# Altium PCB PM_Adapter_Pi_Pico_v3.PcbDoc
Units mil, origin at the board's own origin, x right, y up, seen from the top; angles counter-clockwise.
Board outline 1570 x 2130 mil, 2 copper layers (Top Layer, Bottom Layer); 20 components, 18 nets, 114 pads, 0 vias.
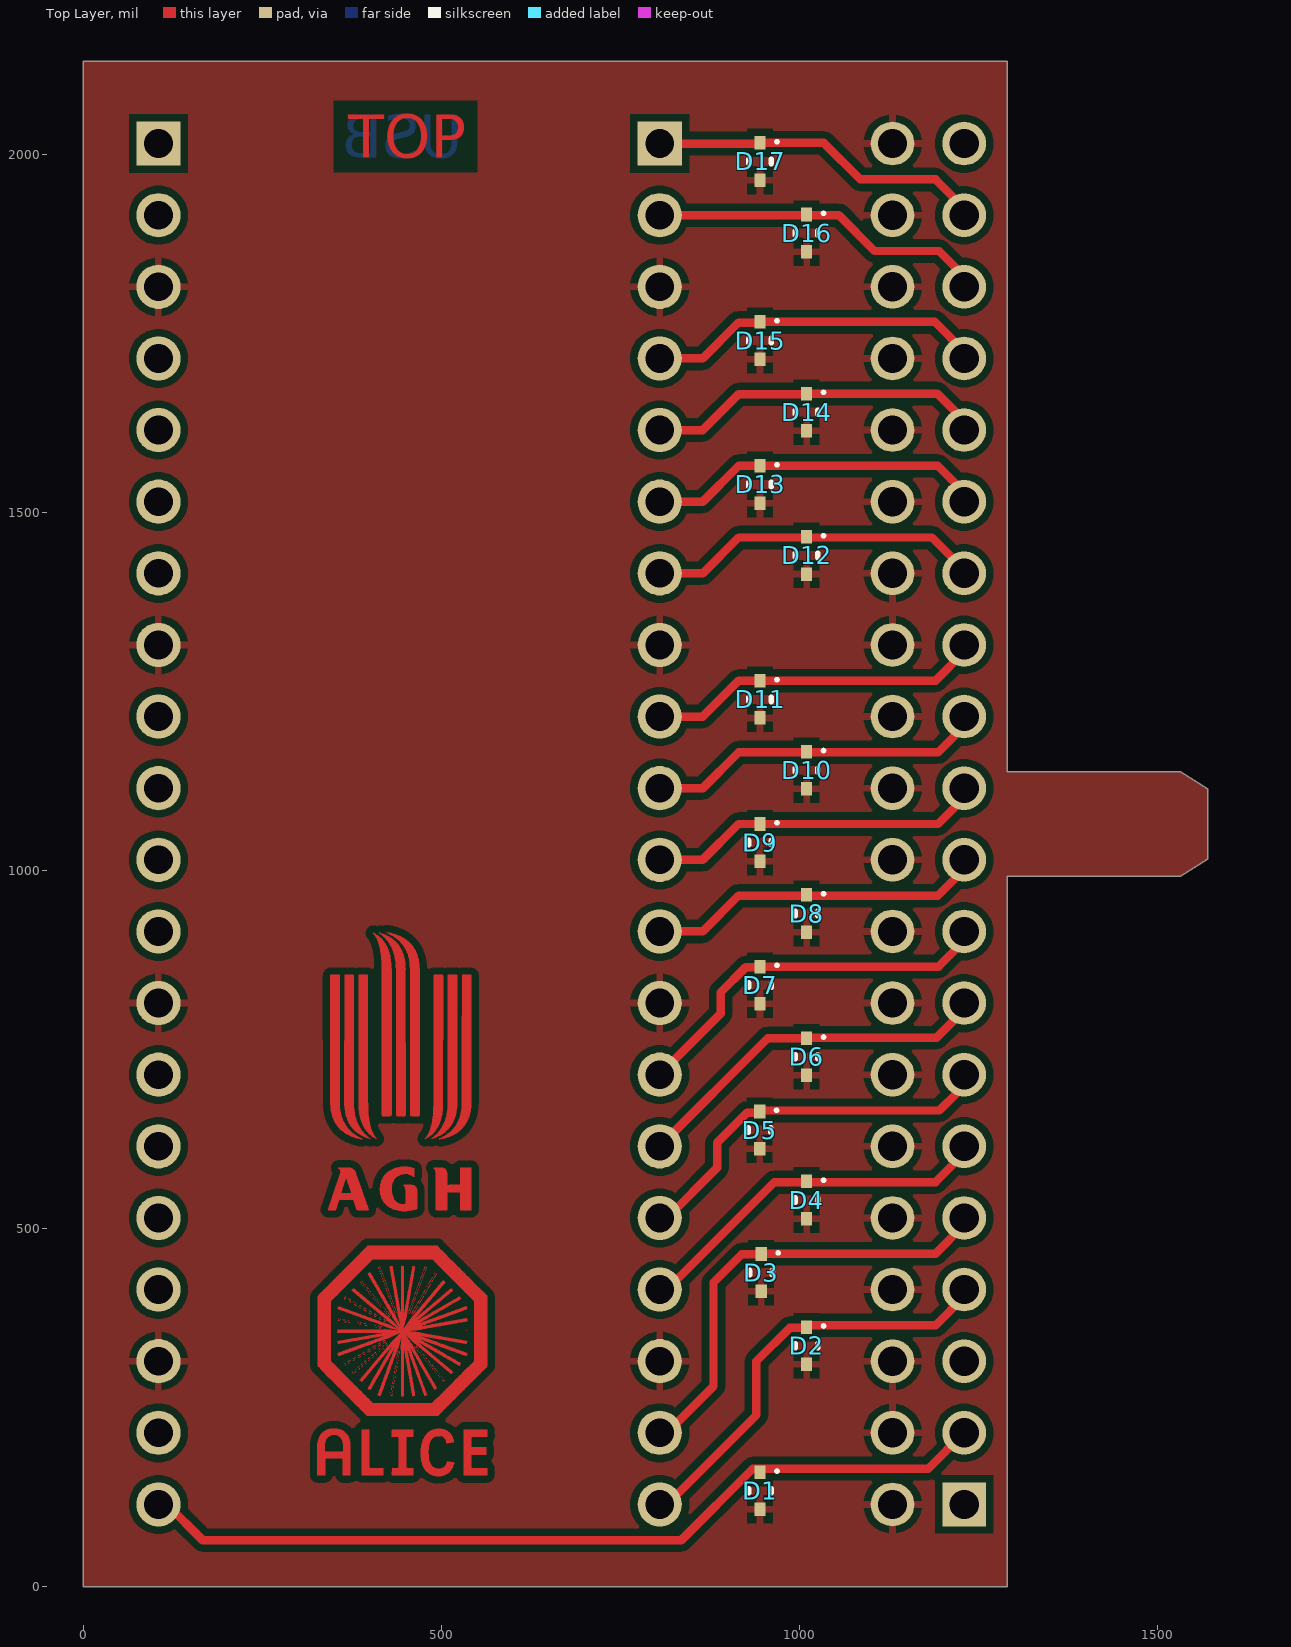
[diagram p0: Top Layer view]
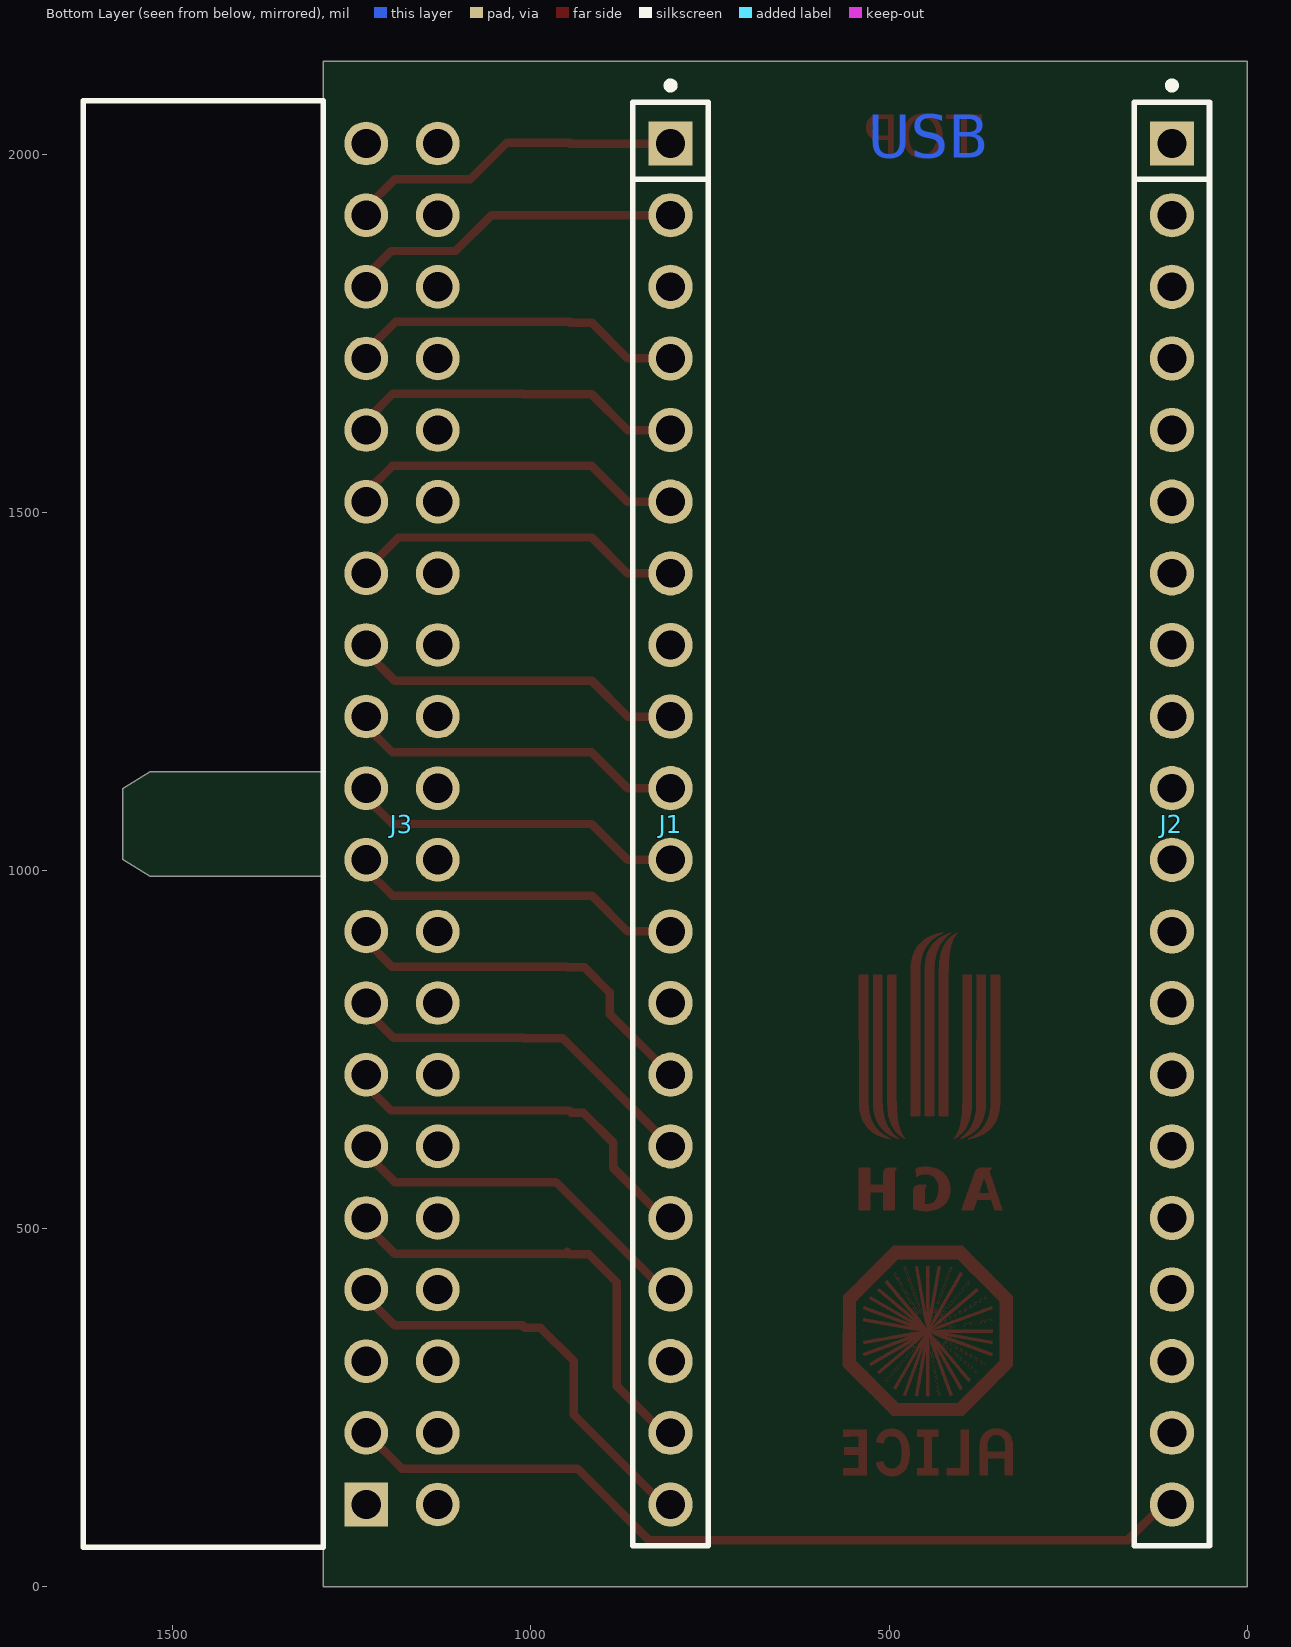
[diagram p1: Bottom Layer view, seen from below]
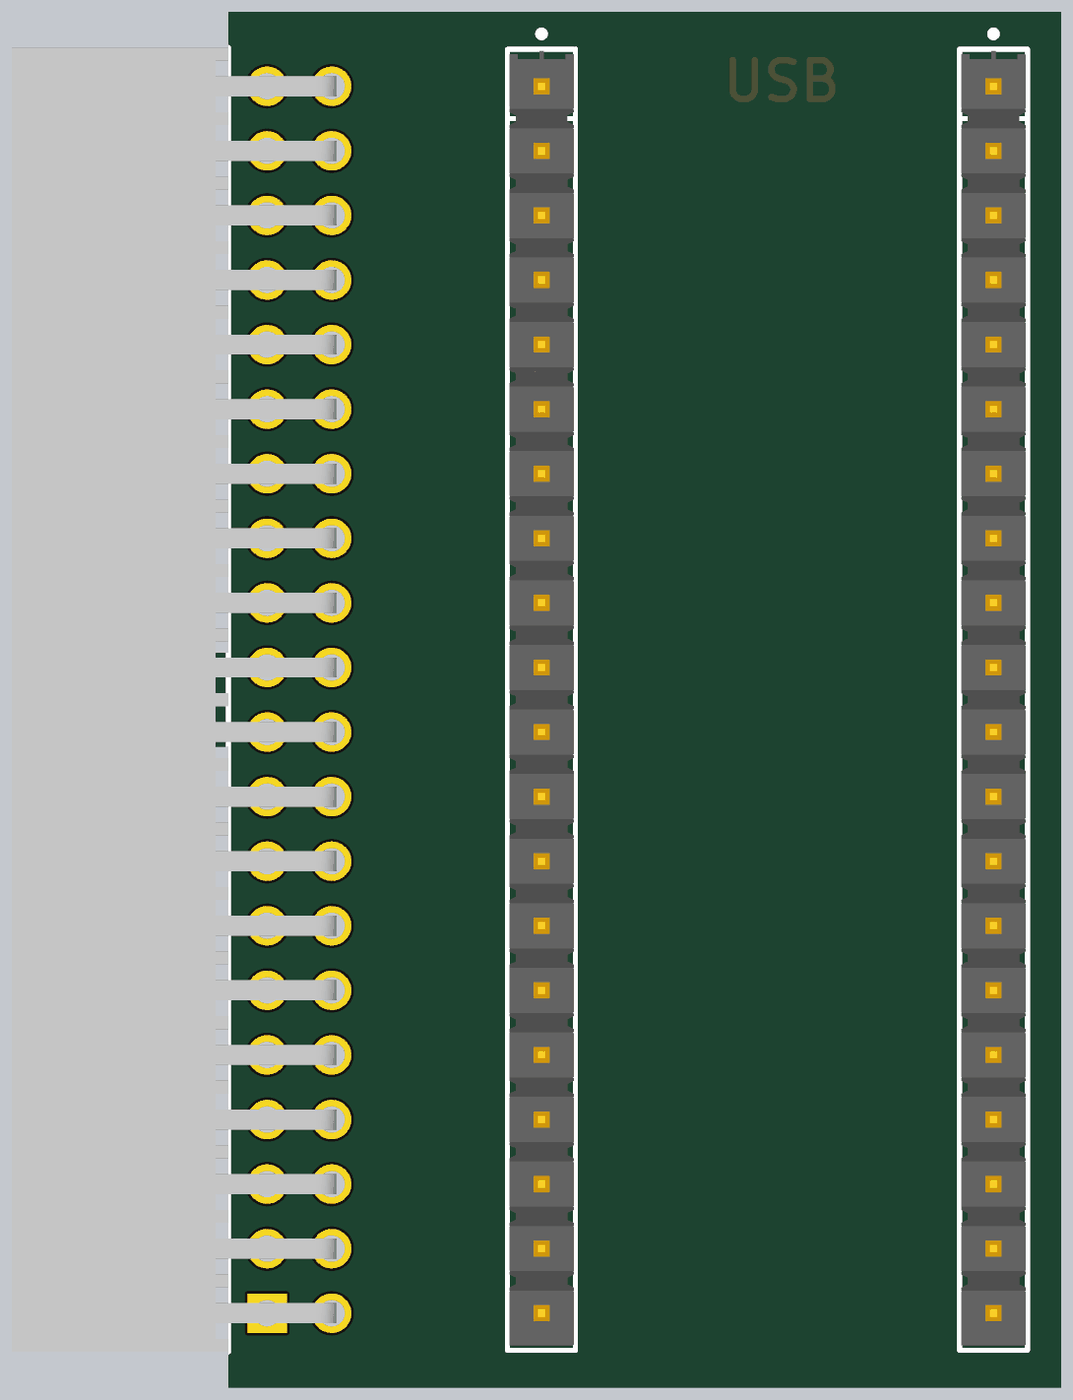
[diagram p2: 3D render of the assembled board from below, using the file's embedded part models]

## Layer stack, top to bottom
Top Solder: solder mask 0.4, Solder Resist, Dk 3.5
Top Layer: signal copper 1.4
Dielectric 1: dielectric 12.6, FR-4, Dk 4.8
Bottom Layer: signal copper 1.4
Bottom Solder: solder mask 0.4, Solder Resist, Dk 3.5

## Board outline
1290,0 1290,992 1532,992 1570,1016 1570,1114 1532,1138 1290,1138 1290,2130 0,2130 0,0

## Design rules (kind name [scope] priority, off if disabled: settings)
Clearance [All] p1: gap=10 ignorepadtopadclearanceinfootprint=FALSE
ComponentClearance [All] p1: gap=0 collisioncheckmode=3 verticalgap=0 showdistances=FALSE
PolygonConnect [All] p1: connectstyle=Relief reliefconductorwidth=10 reliefentries=4 polygonreliefangle="90 Angle" airgapwidth=10
RoutingVias [All] p1: holewidth=28 width=50 viastyle="Through Hole" minholewidth=28 minwidth=50 maxholewidth=28 maxwidth=50
SolderMaskExpansion [All] p1: expansion=4 istentingtop=FALSE
SupplyNets "Schematic Supply Nets" [InNet('GND')] p1: voltage=0.000
Width [All] p1: maxlimit=39.37 minlimit=3.94 preferedwidth=11.81 minimp=50.000000 maximp=50.000000 favimp=50.000000
29 further rules are at their usual default settings.

## Components (designator, comment, footprint, x,y, rotation, side; value= is the part's Value field where it differs from the comment)
D1 "MM5Z3V6T1G" ONSC-SOD-523-2-502-01_V 945,134.02 r270 top
D2 "MM5Z3V6T1G" ONSC-SOD-523-2-502-01_V 1010,336.57 r270 top
D3 "MM5Z3V6T1G" ONSC-SOD-523-2-502-01_V 946.57,438.64 r270 top
D4 "MM5Z3V6T1G" ONSC-SOD-523-2-502-01_V 1010,540 r270 top
D5 "MM5Z3V6T1G" ONSC-SOD-523-2-502-01_V 944.43,637.63 r270 top
D6 "MM5Z3V6T1G" ONSC-SOD-523-2-502-01_V 1010,740 r270 top
D7 "MM5Z3V6T1G" ONSC-SOD-523-2-502-01_V 945,840 r270 top
D8 "MM5Z3V6T1G" ONSC-SOD-523-2-502-01_V 1010,940 r270 top
D9 "MM5Z3V6T1G" ONSC-SOD-523-2-502-01_V 945,1039.02 r270 top
D10 "MM5Z3V6T1G" ONSC-SOD-523-2-502-01_V 1010,1140 r270 top
D11 "MM5Z3V6T1G" ONSC-SOD-523-2-502-01_V 945,1239.02 r270 top
D12 "MM5Z3V6T1G" ONSC-SOD-523-2-502-01_V 1010,1440 r270 top
D13 "MM5Z3V6T1G" ONSC-SOD-523-2-502-01_V 945,1539.02 r270 top
D14 "MM5Z3V6T1G" ONSC-SOD-523-2-502-01_V 1010,1640 r270 top
D15 "MM5Z3V6T1G" ONSC-SOD-523-2-502-01_V 945,1740 r270 top
D16 "MM5Z3V6T1G" ONSC-SOD-523-2-502-01_V 1010,1890 r270 top
D17 "MM5Z3V6T1G" ONSC-SOD-523-2-502-01_V 945,1990 r270 top
J1 "TSW-120-05-G-S" FP-TSW-120-05-G-S-MFG 805,1065 r270 bottom
J2 "TSW-120-05-G-S" FP-TSW-120-05-G-S-MFG 105,1065 r270 bottom
J3 "SSW-120-02-G-D-RA" SMTC-SSW-120-02-X-D-RA 1230,115 r90 bottom

## Footprints (in the part's own frame and the unit in brackets; to place one, negate y for a bottom-side part, rotate by r counter-clockwise, add the part's x,y. Pads: shape width x height; smd on the part's side, far side on the other; paste and mask are expansions set on the pad)
FP-TSW-120-05-G-S-MFG [mm]
  rect 1.57x1.57 hole 1.02 paste-2539.97 mask+0: 1(-24.13,0)
  round 1.57 hole 1.02 paste-2539.97 mask+0: 2(-21.59,0) 3(-19.05,0) 4(-16.51,0) 5(-13.97,0) 6(-11.43,0) 7(-8.89,0) 8(-6.35,0) 9(-3.81,0) 10(-1.27,0) 11(1.27,0) 12(3.81,0) 13(6.35,0) 14(8.89,0) 15(11.43,0) 16(13.97,0) 17(16.51,0) 18(19.05,0) 19(21.59,0) 20(24.13,0)
  silkscreen extent -26.31,-1.34 25.59,1.34, body extent -25.53,-1.27 25.4,1.27, height 5.54
ONSC-SOD-523-2-502-01_V [mm] "SOD, 2-Leads, Body 1.2x0.8mm"
  rect 0.48x0.4 smd: 1(-0.66,0) 2(0.66,0)
  silkscreen extent -0.75,-0.4 0.07,0.65, body extent -0.6,-0.4 0.6,0.4, height 0.7
SMTC-SSW-120-02-X-D-RA [mm] "SQ Post Socket, 2x20 Pins, Right Angle, 2.54mm Pitch, Female"
  rect 1.55x1.55 hole 1.04: 1(0,0)
  round 1.55 hole 1.04: 2(0,-2.54) 3(2.54,0) 4(2.54,-2.54) 5(5.08,0) 6(5.08,-2.54) 7(7.62,0) 8(7.62,-2.54) 9(10.16,0) 10(10.16,-2.54) 11(12.7,0) 12(12.7,-2.54) 13(15.24,0) 14(15.24,-2.54) 15(17.78,0) 16(17.78,-2.54) 17(20.32,0) 18(20.32,-2.54) 19(22.86,0) 20(22.86,-2.54) 21(25.4,0) 22(25.4,-2.54) 23(27.94,0) 24(27.94,-2.54) 25(30.48,0) 26(30.48,-2.54) 27(33.02,0) 28(33.02,-2.54) 29(35.56,0) 30(35.56,-2.54) 31(38.1,0) 32(38.1,-2.54) 33(40.64,0) 34(40.64,-2.54) 35(43.18,0) 36(43.18,-2.54) 37(45.72,0) 38(45.72,-2.54) 39(48.26,0) 40(48.26,-2.54)
  silkscreen extent -1.53,1.52 49.79,10.03, body extent -1.52,-2.74 49.78,10.03, height 4.95

## Part data
D1 D2 D3 D4 D5 D6 D7 D8 D9 D10 D11 D12 D13 D14 D15 D16 D17: library part CMP-1060-00749-1, "Zener Voltage Regulator, 500 mW, 2-Pin SOD-523, Pb-Free, Tape and Reel", Manufacturer="On Semiconductor", ComponentLink1Description="Manufacturer URL", ComponentLink1URL=http://www.onsemi.com/, ComponentLink2Description=Datasheet, ComponentLink2URL=http://www.onsemi.cn/pub_link/Collateral/MM5Z2V4T1-D.PDF, ComponentLink3Description="Package Specification", ComponentLink3URL=http://www.onsemi.com/pub_link/Collateral/502-01.PDF, DatasheetVersion="Rev. 10", Mounting Technology="Surface Mount", P Max (W)=0.5, PackageDescription="2-Pin SOD, Body 1.2 x 0.8 mm", PackageReference=SOD-523-2-502-01, PackageVersion="Rev. E, 09/2010", Packing="Tape and Reel", PartNumber=MM5Z3V6T1G, RoHS=Pb-Free, VZ Typ (V)=3.6
J1 J2: library part CMP-00575-00271415-1, "TSW-120-05-G-S Headers & Wire Housings Classic PCB Header Strips, 0.100 pitch", Color=Black, Manufacturer Lifecycle Status=PRODUCTION, Connector Type="Male Pin", Contact Material=Bronze, Contact Mating Length=2.667mm, Contact Plating=Gold, Gender=Male, Height=2.54mm, Housing Color=Black, Housing Material=Plastic, Lead Free="Lead Free", Lead Pitch=2.54mm, Length=50.8mm, Lifecycle Status=Production, Mount="Through Hole", NexarPartId=271415, Number of Contacts=20, Number of Positions=20, Number of Rows=1, Pitch=2.54mm, REACH SVHC="No SVHC", RoHS=Compliant, Termination=Solder, Width=2.54mm
J3: library part CMP-1023-00460-1, "SQ Post Socket, Through-hole, Right Angle, -55 to 125 degC, 2.54 mm Pitch, 40-Pin, Female, RoHS", Manufacturer=Samtec, Temperature Range="-55 to 125 degC", ComponentLink1Description="Manufacturer URL", ComponentLink1URL=http://www.samtec.com, ComponentLink2Description=Datasheet, ComponentLink2URL=http://www.samtec.com/documents/webfiles/pdf/SSW_TH.PDF, ComponentLink3Description="Package Specification", ComponentLink3URL=http://www.samtec.com/documents/webfiles/cpdf/SSW-1XX-XX-XXX-X-XX-XXX-XX-MKT.pdf, DatasheetVersion=F-214, Mounting Technology=Through-hole, Orientation="Right Angle", PackageDescription="Assembly, Socket Strip .016 X .031 Tail", PackageReference=SSW-120-02-X-D-RA, PackageVersion="CA, 6/1987", PartNumber=SSW-120-02-G-D-RA, Pitch="2.54 mm", RoHS=True

## Nets (pads, with @x,y where several pads share a name; then routed paths per layer and width w, separated by ;. In a path a pad name is that pad's centre, name@x,y a point inside that pad or via, vN(x,y) a via of type N, cw(c..) or ccw(c..) an arc to the next point about the centre after c; other vN are vias at no path point)
GND: D1.2 D2.2 D3.2 D4.2 D5.2 D6.2 D7.2 D8.2 D9.2 D10.2 D11.2 D12.2 D13.2 D14.2 D15.2 D16.2 D17.2 J1.3 J1.8 J1.13 J1.18 J2.3 J2.8 J2.13 J2.18 J3.2 J3.4 J3.6 J3.8 J3.10 J3.12 J3.14 J3.16 J3.18 J3.20 J3.22 J3.24 J3.26 J3.28 J3.30 J3.32 J3.34 J3.36 J3.38 J3.40
GP_0: D17.1 J1.1 J3.37 | length 472.7
  Top Layer w11.81: J1.1 D17.1@945,2015 ; D17.1 1034.02,2015.98 1085,1965 1190,1965 1230,1925 J3.37
GP_1: D16.1 J1.2 J3.35 | length 459.4
  Top Layer w11.81: J1.2 1055,1915 1105,1865 1195,1865 J3.35@1220,1840 ; J3.35 J3.35@1230,1828.32
GP_2: D15.1 J1.4 J3.33 | length 472.7
  Top Layer w11.81: J1.4 865,1715 915,1765 D15.1@945,1765 ; D15.1 1189.02,1765.98 1230,1725 J3.33
GP_3: D14.1 J1.5 J3.31 | length 453.5
  Top Layer w11.81: J1.5 865,1615 915,1665 D14.1@1010,1665 ; D14.1 1192.33,1665.98 1223.32,1635 J3.31@1225,1635
GP_4: D13.1 J1.6 J3.29 | length 462.2
  Top Layer w11.81: J1.6 865,1515 915,1565 D13.1 1193.32,1565 1225,1533.32 J3.29@1225,1525
GP_5: D12.1 J1.7 J3.27 | length 467.9
  Top Layer w11.81: J1.7 865,1415 915,1465 1185,1465 J3.27@1232.5,1417.5
GP_6: D11.1 J1.9 J3.25 | length 472.3
  Top Layer w11.81: J1.9 865,1215 915,1265 1010,1265 1190,1265 1230,1305 J3.25
GP_7: D10.1 J1.10 J3.23 | length 465.6
  Top Layer w11.81: J1.10 865,1115 915,1165 1010,1165 1060,1165 1193.32,1165 J3.23@1233.32,1205
GP_8: D9.1 J1.11 J3.21 | length 465.6
  Top Layer w11.81: J1.11 865,1015 915,1065 940,1065 D9.1 950,1065 1193.32,1065 J3.21@1233.32,1105
GP_9: D8.1 J1.12 J3.19 | length 474.2
  Top Layer w11.81: J1.12 865,915 915,965 1010,965 1193.32,965 1230,1001.68 J3.19
GP_10: D7.1 J1.14 J3.17 | length 523.8
  Top Layer w11.81: J1.14 890,800 890,830 925,865 D7.1@950,865 ; D7.1@950,865.98 1194.3,865.98 1228.32,900 J3.17@1235,900
GP_11: D6.1 J1.15 J3.15 | length 503.4
  Top Layer w11.81: J1.15 955.98,765.98 D6.1 ; D6.1@1010,766.61 1191.61,766.61 J3.15@1230,805
GP_12: D5.1 J1.16 J3.13 | length 532.8
  Top Layer w11.81: J1.16 815,515 885,585 885,620 927.14,662.14 943.54,662.14 946.4,665 1195.26,665 1220.58,690.32 J3.13@1220.58,714.42
GP_13: D4.1 J1.17 J3.11 | length 503.7
  Top Layer w11.81: J1.17 815,415 965,565 1010,565 1190,565 J3.11@1230,605
GP_14: D3.1 J1.19 J3.9 | length 641.4
  Top Layer w11.81: J1.19 815,215 880,280 880,425 919.12,464.12 947.5,464.12 949.47,466.09 D3.1@949.47,467.52 ; D3.1@950,465 1190,465 1230,505 J3.9
GP_15: D2.1 J1.20 J3.7 | length 589.4
  Top Layer w11.81: J1.20 815,115 940,240 940,315 986.42,361.42 1008.86,361.42 D2.1@1011.97,364.53 ; D2.1@1011.44,365 1190,365 J3.7@1230,405
GP_16: D1.1 J2.20 J3.3 | length 1207.8
  Top Layer w11.81: J2.20 116.92,115 166.92,65 835,65 935,165 940,165 945,165 1180,165 J3.3
pads on no net: J2.1 J2.2 J2.4 J2.5 J2.6 J2.7 J2.9 J2.10 J2.11 J2.12 J2.14 J2.15 J2.16 J2.17 J2.19 J3.1 J3.5 J3.39

## Polygon pours and split planes (outlines as drawn)
GND on Top Layer "GND_L01_P000" (solid, pour order 0): 1290,1138 1532,1138 1570,1114 1570,1016 1532,992 1290,992 1290,0 0,0 0,2130 1290,2130

## Other copper
Top Layer:
  drawing of 723 lines, arcs and shapes, not listed
  text "TOP" at 370,1995 h60
Bottom Layer:
  text "USB" at 530,1995 h60